# Altium PCB ECGSingleLead.PcbDoc
Units mil, origin at the board's own origin, x right, y up, seen from the top; angles counter-clockwise.
Board outline 4330.71 x 1181.1 mil, 4 copper layers (Top Layer, GND, POWER, Bottom Layer), stack 63.977 mil thick; 36 components, 28 nets, 134 pads, 29 vias.
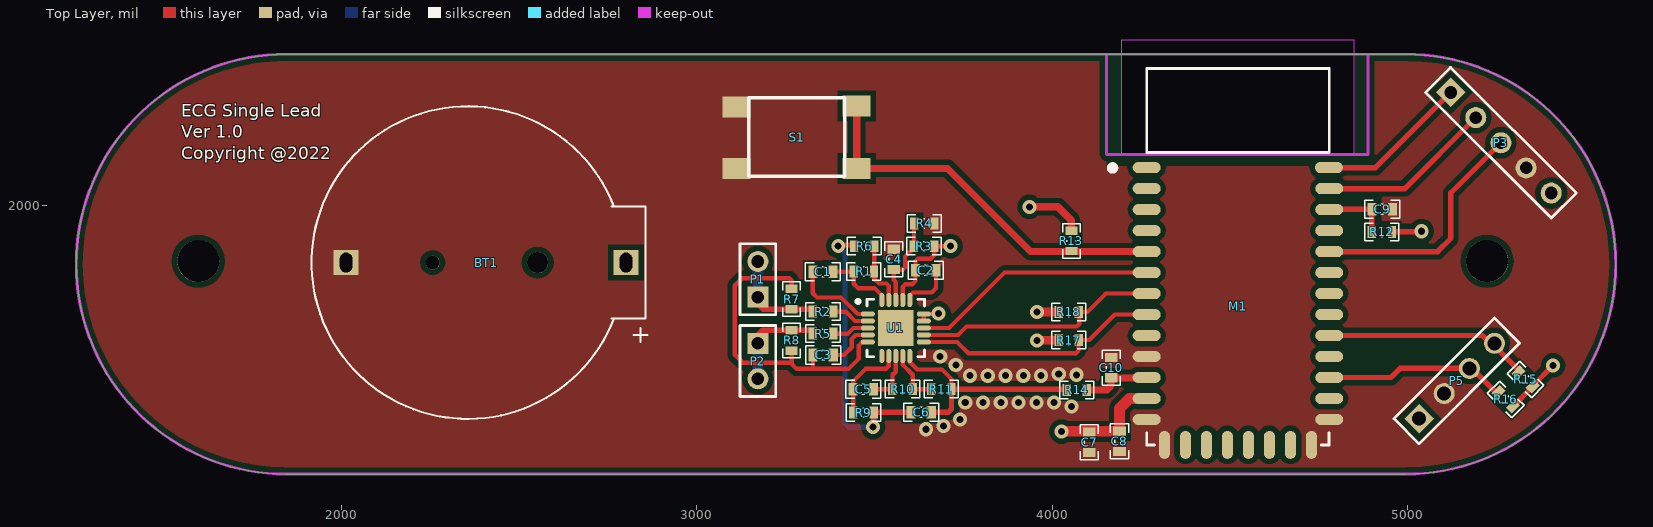
[diagram p0: Top Layer view]
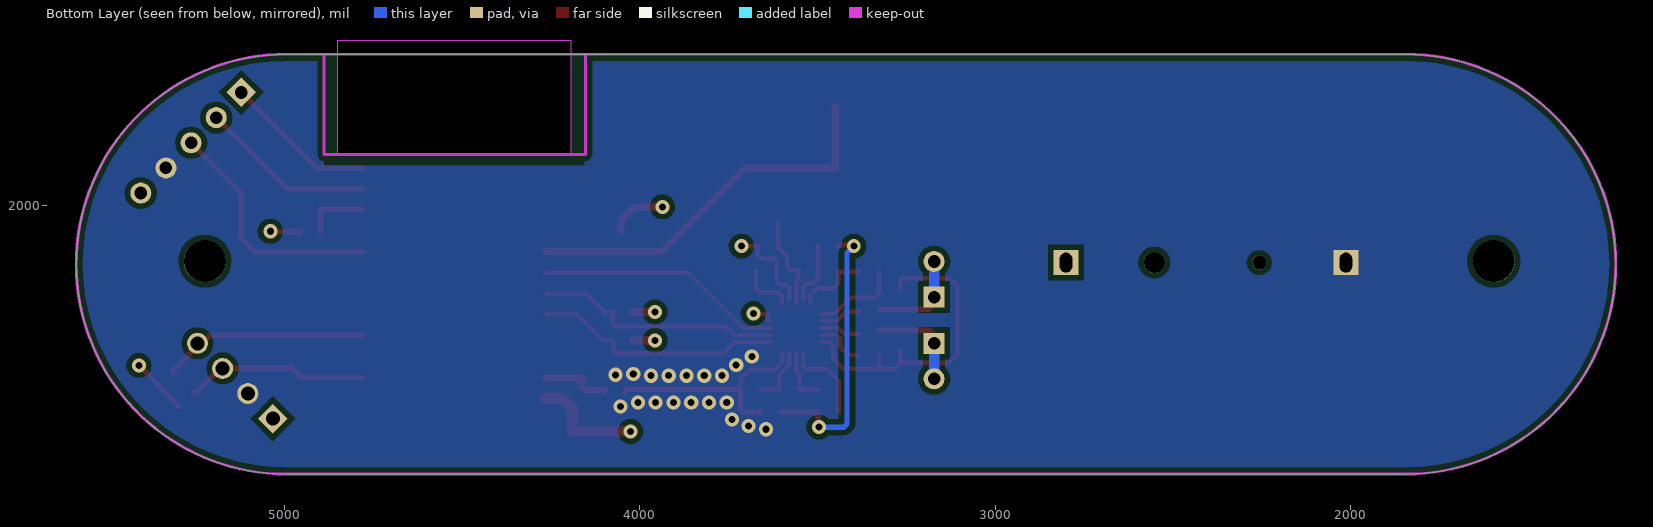
[diagram p1: Bottom Layer view, seen from below]
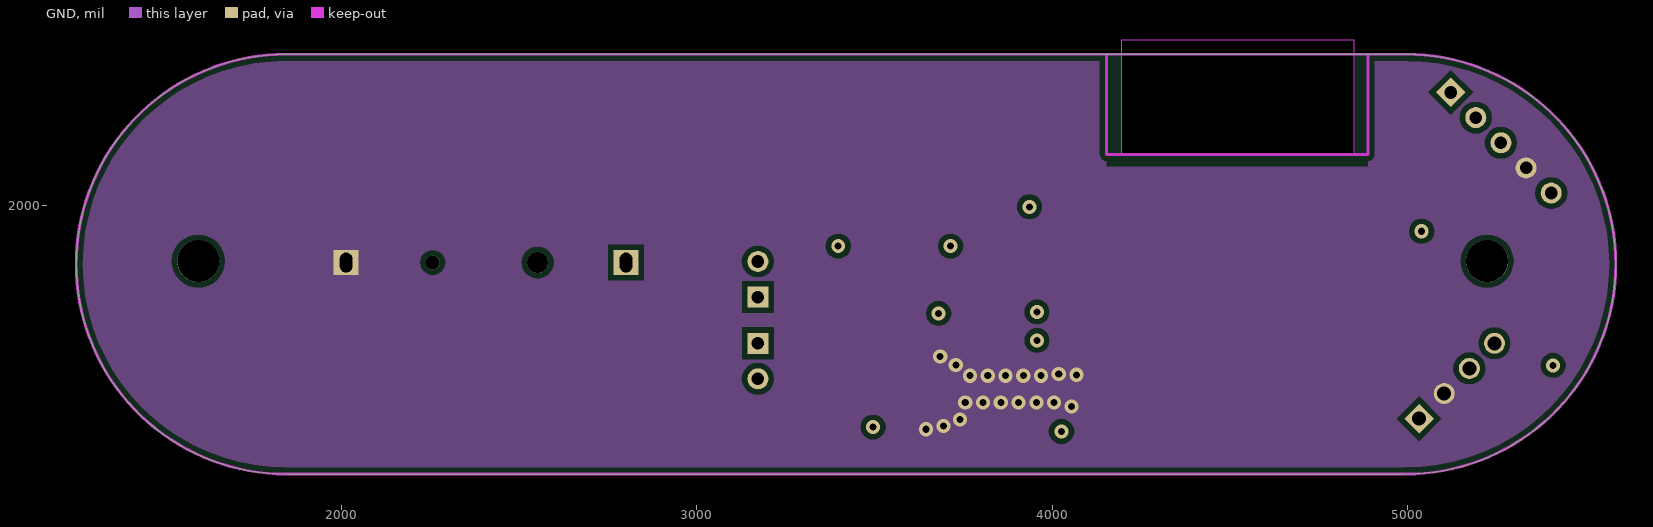
[diagram p2: GND]
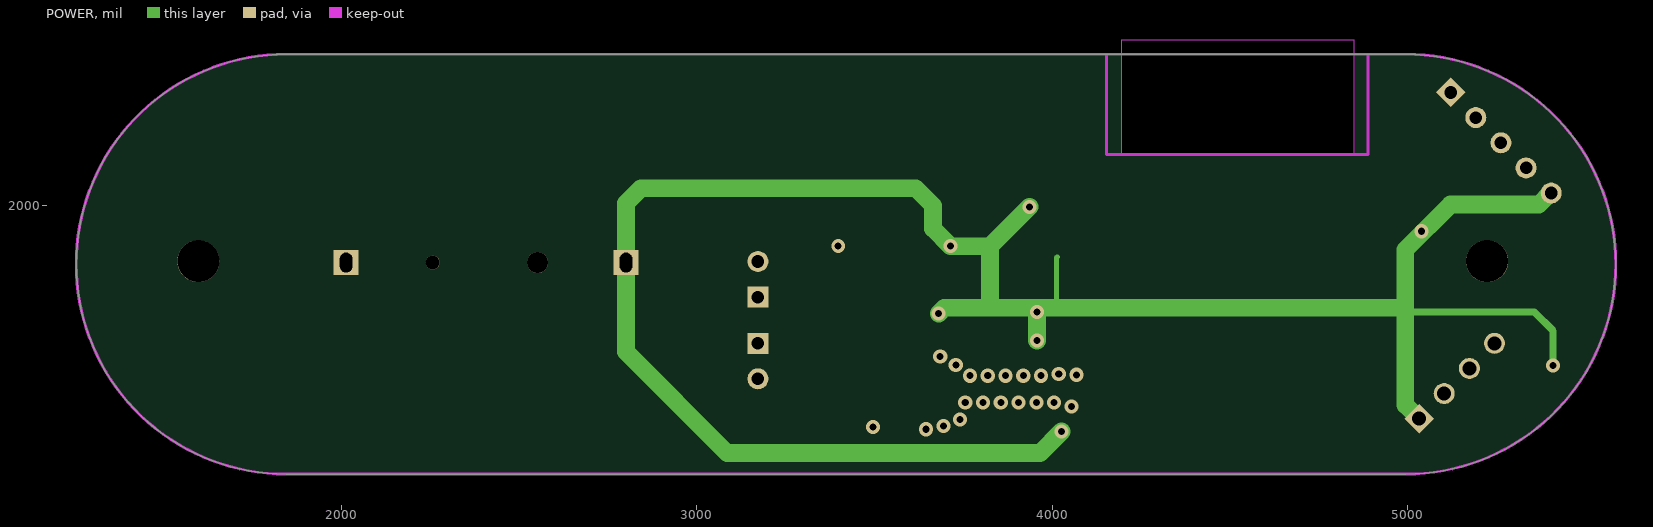
[diagram p3: POWER]
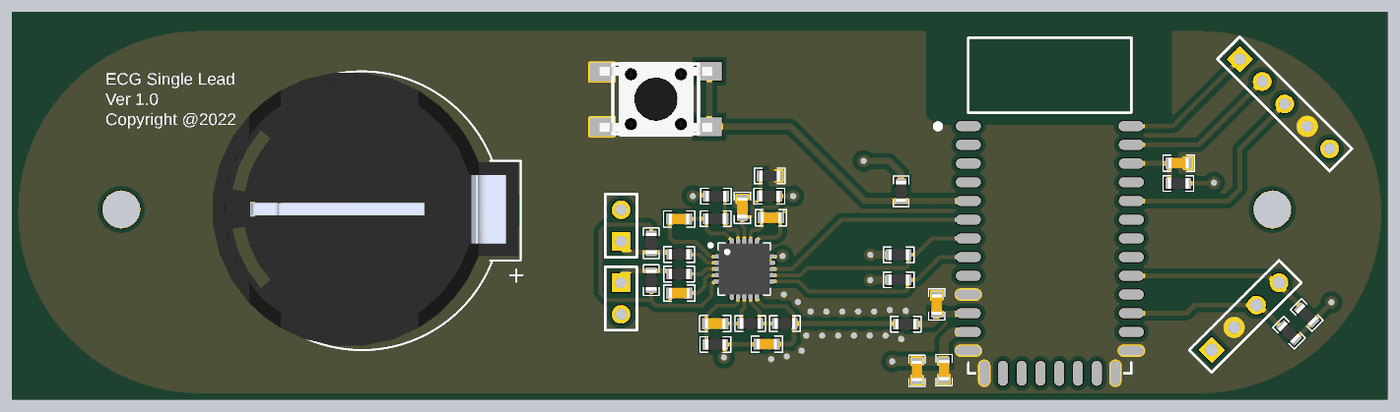
[diagram p4: 3D render of the assembled board from above, using the file's embedded part models]

## Layer stack, top to bottom
Top Solder: solder mask 0.3937, Solder Resist, Dk 3.5
Top Layer: signal copper 1.378
Prepreg 2 - 2116: prepreg 9.7244, PP-016, Dk 4.4
GND: signal copper 1.378
Core 1: core 39.0157, Core-042, Dk 4.6
POWER: signal copper 1.378
Prepreg 3 - 2116: prepreg 9.7244, PP-016, Dk 4.4
Bottom Layer: signal copper 1.378
Bottom Solder: solder mask 0.3937, Solder Resist, Dk 3.5

## Board outline
1845,1244 cw(c1845,1834.55) 1845,2425.1 4994.61,2425.1 cw(c4994.61,1834.55) 4994.61,1244
cut-out: 4194,2465 4194,2143 4850,2143 4850,2465

## Design rules (kind name [scope] priority, off if disabled: settings)
Clearance [All] p1: gap=15 ignorepadtopadclearanceinfootprint=TRUE except(5: Arc-SMDPad Track-SMDPad SMDPad-SMDPad; 6: Arc-Arc Arc-Track Track-Track; 7.87: Arc-THPad Track-THPad; 8: Arc-Text Arc-Hole Track-Text Track-Hole SMDPad-THPad SMDPad-Via SMDPad-Text SMDPad-Hole THPad-Via THPad-Text THPad-Hole Via-Text Via-Hole Fill-Text Fill-Hole Poly-Text Poly-Hole Region-Text Region-Hole Text-Text Text-Hole; 10: Arc-Via Track-Via Via-Via; 19.68: THPad-THPad)
HoleSize [All] p1: absolutevalues=TRUE maxlimit=248.03 minlimit=7.87 maxpercent=80.000 minpercent=20.000
PolygonConnect [All] p1: connectstyle=Direct reliefconductorwidth=10 reliefentries=4 polygonreliefangle="90 Angle" airgapwidth=10
RoutingVias [All] p1: holewidth=20 width=40 viastyle="Through Hole" minholewidth=7.87 minwidth=17.72 maxholewidth=20 maxwidth=40
SolderMaskExpansion [All] p1: expansion=4 istentingtop=FALSE
Width [OnLayer('GND') or OnLayer('POWER')] p1: maxlimit=100 minlimit=3.5 preferedwidth=10 toplayer_maxwidth=80 midlayer1_minwidth=10 midlayer2_minwidth=10 bottomlayer_maxwidth=80 minimp=50.000000 maximp=50.000000 favimp=50.000000
29 further rules are at their usual default settings.

## Components (designator, comment, footprint, x,y, rotation, side; value= is the part's Value field where it differs from the comment)
BT1 "Battery" BTH2032_DIP 1916.3,1837 r180 top
C1 "Cap" CAP0603 3355,1813 r180 top value=3.3uF
C2 "Cap" CAP0603 3644,1817 r180 top value=0.1uF
C3 "Cap" CAP0603 3355.46,1579 r180 top value=1nF
C4 "Cap" CAP0603 3554,1848 r270 top value=0.1uF
C5 "Cap" CAP0603 3468.54,1483 r0 top value=5.6nF
C6 "Cap" CAP0603 3631,1418 r0 top value=5.6nF
C7 "Cap" CAP0603 4104,1333.54 r270 top value=2.2uF
C8 "Cap" CAP0603 4189,1336 r270 top value=0.1uF
C9 "Cap" CAP0603 4928,1989.28 r0 top value=1uF
C10 "Cap" CAP0603 4166,1543.46 r90 top value=0.1uF
M1 "YJ-16048" YJ-16048 4522.31,1716.15 r0 top
P1 "Header 2" HDR1X2 3172,1742 r90 top
P2 "Header 2" HDR1X2 3172,1612 r270 top
P3 "Header 5" HDR1X5 5120.58,2317.42 r315 top
P5 "Header 4" HDR1X4 5031.87,1399.87 r45 top
R1 "Res1" RES0603 3470,1814 r0 top value=10M
R2 "Res1" RES0603 3355,1701 r0 top value=180K
R3 "Res1" RES0603 3639,1885 r180 top value=10M
R4 "Res1" RES0603 3640,1949 r180 top value=10M
R5 "Res1" RES0603 3355,1639 r0 top value=180K
R6 "Res1" RES0603 3471,1885 r180 top value=499K
R7 "Res1" RES0603 3267,1736.46 r90 top value=10M
R8 "Res1" RES0603 3267,1620 r270 top value=10M
R9 "Res1" RES0603 3469,1417 r0 top value=1M
R10 "Res1" RES0603 3579,1483 r180 top value=1M
R11 "Res1" RES0603 3688,1483 r180 top value=1M
R12 "Res1" RES0603 4927.02,1925 r180 top value=47K
R13 "Res1" RES0603 4054,1900 r90 top value=4.7K
R14 "Res1" RES0603 4069,1481 r0 top value=1.5K
R15 "Res1" RES0603 5331.34,1510.11 r135 top value=4.7K
R16 "Res1" RES0603 5275.48,1454.25 r315 top value=4.7K
R17 "Res1" RES0603 4046.46,1621 r0 top value=4.7K
R18 "Res1" RES0603 4046.46,1700 r180 top value=4.7K
S1 "SW-PB" SW-4PIN-SMD 3273,2192 r0 top
U1 "AD8233" CP-20-8 3560,1655 r0 top

## Footprints (in the part's own frame and the unit in brackets; to place one, negate y for a bottom-side part, rotate by r counter-clockwise, add the part's x,y. Pads: shape width x height; smd on the part's side, far side on the other; paste and mask are expansions set on the pad)
BTH2032_DIP [mm]
  round 1.5 hole 1.5 unplated: 0(-16.154,-0.051)
  round 1 hole 1 unplated: 0(-8.661,-0.051)
  rect 1.8x1.8 hole 0.9 slot 1.4 at 90 deg: 1(-22.471,-0.051) 2(-2.471,-0.051)
  silkscreen extent -24.02,-11.22 -0.01,11.12, body extent -23.67,-11.18 0.83,10.82, height 8.6
CAP0603 [mm] "Chip Capacitor, 2-Leads, Body 1/60x0/80mm, IPC Medium Density DESIGNER:ABBAS BASEREH"
  rect 0.65x0.9 smd: 1(-0.725,0) 2(0.725,0)
  silkscreen extent -1.25,-0.65 1.25,0.65, body extent -0.82,-0.43 0.82,0.43, height 0.4
CP-20-8 [mm]
  oval 1x0.35 smd: 1(-2,1) 2(-2,0.5) 3(-2,0) 4(-2,-0.5) 5(-2,-1) 11(2,-1) 12(2,-0.5) 13(2,0) 14(2,0.5) 15(2,1)
  oval 0.35x1 smd: 6(-1,-2) 7(-0.5,-2) 8(0,-2) 9(0.5,-2) 10(1,-2) 16(1,2) 17(0.5,2) 18(0,2) 19(-0.5,2) 20(-1,2)
  rect 2.55x2.55 smd: ""(0,0)
  silkscreen extent -2.82,-2.05 2.05,2.05, body extent -2.05,-2.05 2.05,2.05, height 0.8
HDR1X2 [mm] "Connector; Header; 2 Position"
  rect 1.5x1.5 hole 0.9: 1(0,0)
  round 1.5 hole 0.9: 2(2.54,0)
  silkscreen extent -1.27,-1.27 3.81,1.27
HDR1X4 [mm] "Connector; Header; 4 Position"
  rect 1.5x1.5 hole 1: 1(0,0)
  round 1.5 hole 1: 2(2.54,0) 3(5.08,0) 4(7.62,0)
  silkscreen extent -1.27,-1.27 8.89,1.27
HDR1X5 [mm] "Connector; Header; 5 Position"
  rect 1.5x1.5 hole 0.9: 1(0,0)
  round 1.5 hole 0.9: 2(2.54,0) 3(5.08,0) 4(7.62,0) 5(10.16,0)
  silkscreen extent -1.27,-1.27 11.43,1.27
RES0603 [mm] "Chip Resistor, 2-Leads, Body 1/60x0/80mm, IPC Medium Density DESIGNER:ABBAS BASEREH"
  rect 0.6x0.85 smd: 1(-0.725,0) 2(0.725,0)
  silkscreen extent -1.22,-0.63 1.22,0.63, body extent -0.82,-0.43 0.82,0.43, height 0.4
SW-4PIN-SMD [mil]
  rect 78.74x59.06 smd: 1(177,-88) 1(177,87) 2(-161,-88) 2(-161,85)
  silkscreen extent -127,-110 143,110, body extent -168,-119 186,117, height 174
YJ-16048 [mm]
  oval 2x0.8 smd: 1(-6.52,9.905) 2(-6.52,8.405) 3(-6.52,6.905) 4(-6.52,5.405) 5(-6.52,3.905) 6(-6.52,2.405) 7(-6.52,0.905) 8(-6.52,-0.595) 9(-6.52,-2.095) 10(-6.52,-3.595) 11(-6.52,-5.095) 12(-6.52,-6.595) 13(-6.52,-8.095) 22(6.52,-8.095) 23(6.52,-6.595) 24(6.52,-5.095) 25(6.52,-3.595) 26(6.52,-2.095) 27(6.52,-0.595) 28(6.52,0.905) 29(6.52,2.405) 30(6.52,3.905) 31(6.52,5.405) 32(6.52,6.905) 33(6.52,8.405) 34(6.495,9.905)
  oval 0.8x2 smd: 14(-5.25,-9.905) 15(-3.75,-9.905) 16(-2.25,-9.905) 17(-0.75,-9.905) 18(0.75,-9.905) 19(2.25,-9.905) 20(3.75,-9.905) 21(5.25,-9.905)
  silkscreen extent -9.16,-9.91 6.52,17, body extent -6.56,-9.91 6.56,17.04, height 0.8

## Part data
BT1: "Multicell Battery", LatestRevisionDate=17-Jul-2002, LatestRevisionNote="Re-released for DXP Platform.", PackageDescription="Battery; 2 Leads", PackageReference=BAT-2, Published=24-Mar-1999, Publisher="Altium Limited"
C1 C2 C3 C4 C5 C6 C7 C8 C9 C10: "Capacitor", LatestRevisionDate=17-Jul-2002, LatestRevisionNote="Re-released for DXP Platform.", PackageDescription="Radial Cap, Thru-Hole; 2 Leads; 0.3 in Pin Spacing", PackageReference=RAD-0.3, Published=8-Jun-2000, Publisher="Altium Limited"
M1: library part nrf52832-M, "nrf52832 Module-Bluetooth 5.0 Low Energy Module", LatestRevisionDate=17-Jul-2002, LatestRevisionNote="Re-released for DXP Platform.", Publisher="Altium Limited"
P1 P2: "Header, 2-Pin", LatestRevisionDate=17-Jul-2002, LatestRevisionNote="Re-released for DXP Platform.", Publisher="Altium Limited"
P3: "Header, 5-Pin", LatestRevisionDate=17-Jul-2002, LatestRevisionNote="Re-released for DXP Platform.", Publisher="Altium Limited"
P5: "Header, 4-Pin", LatestRevisionDate=17-Jul-2002, LatestRevisionNote="Re-released for DXP Platform.", Publisher="Altium Limited"
R1 R2 R3 R4 R5 R6 R7 R8 R9 R10 R11 R12 R13 R14 R15 R16 R17 R18: "Resistor", LatestRevisionDate=17-Jul-2002, LatestRevisionNote="Re-released for DXP Platform.", PackageDescription="Axial Device, Thru-Hole; 2 Leads; 0.3 in Pin Spacing", PackageReference=AXIAL-0.3, Published=8-Jun-2000, Publisher="Altium Limited"
S1: "Switch", LatestRevisionDate=17-Jul-2002, LatestRevisionNote="Re-released for DXP Platform.", PackageDescription="Switch; 2 Leads", PackageReference=SPST-2, Published=24-Mar-1999, Publisher="Altium Limited"
U1: library part AD8232, "Single-Lead, Heart Rate Monitor Front End", LatestRevisionDate=17-Jul-2002, LatestRevisionNote="Re-released for DXP Platform.", Publisher="Altium Limited"

## Free pads (board coordinates)
  round 118.11 hole 118.11: ""(1598,1843) ""(5223,1843)

## Via types
v1: diameter 40, hole 20, Top Layer to Bottom Layer, tented both sides, 21 vias
v2: diameter 39.37, hole 19.68, Top Layer to Bottom Layer, tented both sides, 8 vias

## Nets (pads, with @x,y where several pads share a name; then routed paths per layer and width w, separated by ;. In a path a pad name is that pad's centre, name@x,y a point inside that pad or via, vN(x,y) a via of type N, cw(c..) or ccw(c..) an arc to the next point about the centre after c; other vN are vias at no path point)
+Vs: BT1.1 C2.2 C7.1 C8.1 M1.12 P3.5 P5.1 R3.1 R12.1 R13.2 R15.1 R16.2 R17.1 R18.2 U1.14 U1.15 U1.17 | length 7555.9
  Top Layer w12: U1.17 3579.69,1770.97 3586.71,1778 3606,1778 3615,1787 3615,1842.97 3622.03,1850 3658,1850 3668,1860 3668,1884.54 R3.1 v2(3714,1885) ; U1.14 U1.15 3678.82,1694.37 v2(3680.48,1696.03)
  Top Layer w15: R13.2@4053.54,1929 R13.2 ; R12.1 4956.56,1926 5034,1926 5037,1929 v1(5039,1927) ; R16.2 R15.1 5351.53,1492.53 v2(5409,1550) ; P3.5@5395.58,2034.58 P3.5
  Top Layer w20: v2(3936,1996) 4015.46,1996 4053.54,1957.92 R13.2@4053.54,1929
  Top Layer w25: v2(3957,1620) 3957.5,1620.5 4017.41,1620.5 R17.1 ; v2(3957,1700) R18.2@4017.46,1700 ; v1(4026,1363.54) 4027.16,1362.38 4103.7,1362.38 C7.1
  Top Layer w30: v1(4026,1363.54) 4026.5,1364.04 4188.5,1364.04 C8.1 4189,1428.5 4217,1456.5 M1.12
  POWER w15: 4012,1712 4012,1852.69 4014,1854.69
  POWER w20: 4993,1712 5005,1700 5356,1700 5409,1647 v2(5409,1550)
  POWER w50: BT1.1@2800.7,1861 2800.7,2005.7 2843,2048 3615.71,2048 3664.86,1998.86 3664.86,1934.14 v2(3714,1885) 3825,1885 ; BT1.1 2801,1588 3086,1303 3965.46,1303 v1(4026,1363.54) ; v2(3680.48,1696.03) 3696.45,1712 3825,1712 ; v2(3936,1996) 3825,1885 ; v2(3957,1620) v2(3957,1700) ; P5.1 4993,1438.74 4993,1712 ; P3.5 5400.97,2034.58 5368.39,2002 5120,2002 4993,1875 4993,1712 ; 3825,1712 4012,1712 4993,1712 ; 3825,1712 3825,1885
ECG_OUT: C10.1 M1.11 R14.2 | length 205.1
  Top Layer w20: R14.2 4139.22,1481 4153.28,1481 4165,1492.72 C10.1@4165,1513.78 ; C10.1@4158.28,1512.12 4161.08,1514.91 C10.1 4165,1513.91 C10.1@4165,1513.78 ; M1.11 4263.83,1513.78 C10.1@4165,1513.78
GND: BT1.2 C2.1 C4.1 C7.2 C8.2 C9.2 C10.2 M1.10 M1.13 M1.14 M1.21 M1.22 P3.4 P5.2 R4.1 S1.2 U1.16 | length 153.9
  Top Layer w12: U1.16@3599.37,1724.88 3599.71,1725.22 3599.71,1746.71 3608,1755 3661,1755 3673,1767 3673,1816.54 C2.1
  other v1: 3644.82,1370.28 3694.01,1379.25 3740.64,1397.28 4054.08,1434.25 3755.27,1445.09 3805.27,1445.09 3855.27,1445.09 3905.27,1445.09 3955.27,1445.09 4005.27,1445.09 3768.57,1520.91 3818.57,1520.91 3868.57,1520.91 3918.57,1520.91 3968.57,1520.91 4068.25,1523.28 4018.32,1525.93 3728.79,1551.19 3684.69,1574.75
KEY: M1.5 R13.1 S1.1 | length 1087.6
  Top Layer w20: S1.1@3450,2279 3450,2104 3705,2104 3847,1962 3939.11,1869.89 4057,1869.89 M1.5
LEAD_N: P2.1 P2.2 R5.1 R8.1 | length 284
  Top Layer w15: P2.1 3176,1616 3176,1640.21 3184.79,1649 R5.1@3326.46,1649
  Bottom Layer w30: P2.2 P2.1
LEAD_P: P1.1 P1.2 R2.1 R7.1 | length 279.8
  Top Layer w15: P1.1 3176,1738 3176,1718.79 3186.79,1708 R2.1@3326.46,1708
  Bottom Layer w30: P1.1 P1.2
LEADOFF_N: M1.8 R17.2 U1.11 | length 710.8
  Top Layer w12: U1.11@3629.88,1615.63 3732.37,1615.63 3764,1584 4066.97,1584 4074,1591.03 4074,1620 R17.2 4104,1621 4175.72,1692.72 M1.8
LEADOFF_P: M1.7 R18.1 U1.12 | length 705.9
  Top Layer w12: U1.12@3629.88,1635.32 3735.32,1635.32 3759,1659 4068.97,1659 4076,1666.03 4076,1698.54 4074.54,1700 4099,1700 4150.78,1751.78 M1.7
NetC1_1: C1.1 R1.1 U1.20 | length 207.3
  Top Layer w12: C1.1 3384.04,1813.5 3440.96,1813.5 R1.1 3441.46,1779.54 3454,1767 3500.01,1767 3520.63,1746.38 U1.20 ; U1.20@3520.29,1733.74 3520.29,1725.22 U1.20@3520.63,1724.88
NetC1_2: C1.2 U1.1 | length 248.2
  Top Layer w12: C1.2 3326.46,1752.54 3338,1741 3406,1741 3452.63,1694.37 U1.1@3490.12,1694.37
NetC3_1: C3.1 U1.4 | length 142.9
  Top Layer w12: C3.1 3414,1579 3436,1601 3436,1624 3447.32,1635.32 U1.4@3490.12,1635.32
NetC3_2: C3.2 R7.2 R8.2 U1.5 | length 918.2
  Top Layer w12: R8.2 3267,1554 ; R7.2 3267,1787.97 3259.97,1795 3128,1795 3107,1774 3107,1580 3130,1557 3264,1557 3267,1554 ; C3.2 3326.91,1541.09 3328,1540 ; U1.5@3490.12,1615.63 3465.63,1615.63 3456,1606 3456,1569 3427,1540 3328,1540 ; 3267,1554 3281,1540 3328,1540
NetC4_2: C4.2 R3.2 R4.2 U1.18 | length 264.7
  Top Layer w12: C4.2 3554,1790 3560,1784 U1.18 U1.18@3560,1724.88 ; C4.2@3555,1819.46 3555.46,1819 3578.97,1819 3586,1826.03 3586,1855.62 3610.46,1880.08 R3.2 3610.96,1885.5 3610.96,1948.5 R4.2
NetC5_1: C5.1 R9.1 U1.7 | length 243.3
  Top Layer w12: R9.1 3440.46,1505.97 3474.49,1540 3532,1540 3539.97,1547.97 3539.97,1575.92 U1.7 ; U1.7@3539.97,1576.26 3539.97,1584.78 U1.7@3540.32,1585.12
NetC5_2: C5.2 R10.2 U1.8 | length 160.9
  Top Layer w12: C5.2 R10.2 3550.46,1525 3553,1525 3560,1532 U1.8 U1.8@3560,1585.12
NetC6_1: C6.1 R6.2 R9.2 | length 784.9
  Top Layer w15: v2(3398,1885) 3401.48,1888.48 3438.98,1888.48 R6.2 ; v2(3496,1376) 3497.54,1377.54 R9.2 3498.04,1417.5 3601.96,1417.5 C6.1
  Bottom Layer w15: v2(3398,1885) 3417,1866 3417,1385 3426,1376 v2(3496,1376)
NetC6_2: C6.2 R11.1 R14.1 U1.10 | length 647.8
  Top Layer w12: U1.10@3599.37,1585.12 3599.37,1558.63 3620,1538 3690,1538 3716.54,1511.46 R11.1
  Top Layer w15: C6.2 3659.54,1422.54 3660,1423 3660,1422.84 3664.84,1418 3707.76,1418 3716.54,1426.79 R11.1 4035.38,1483 4041.46,1476.92 R14.1@4041.46,1472
NetR1_2: R1.2 R6.1 U1.19 | length 180.8
  Top Layer w12: R6.1 3499.04,1884.5 3499.04,1793.42 3512.47,1780 3533.29,1780 3540.32,1772.97 U1.19
NetR2_2: R2.2 U1.2 | length 117.5
  Top Layer w12: R2.2 3419,1701 3445.32,1674.68 U1.2@3490.12,1674.68
NetR5_2: R5.2 U1.3 | length 113.2
  Top Layer w12: R5.2 3425,1639 3441,1655 U1.3@3490.12,1655
NetR10_1: R10.1 R11.2 U1.9 | length 165.6
  Top Layer w12: U1.9@3579.68,1585.12 3579.68,1551.32 3607.54,1523.46 R10.1 R11.2
rst_nrf: C9.1 M1.32 R12.2 | length 184
  Top Layer w15: M1.32 4779.64,1988.64 4898.81,1988.64 4898.96,1988.49 4898.96,1925.49 R12.2
RX_nrf: M1.26 P5.4 R15.2 | length 579.7
  Top Layer w15: M1.26 5210.41,1633.67 5239.35,1604.73 5244,1604.73 5311.75,1536.98 5311.75,1530.88 R15.2
S\H\D\N\_\A\M\P\: M1.6 U1.13 | length 700.3
  Top Layer w12: U1.13@3629.88,1655 3710,1655 3865.83,1810.83 M1.6
SWCLK: M1.33 P3.2 | length 495
  Top Layer w15: M1.33 4991.63,2047.06 P3.2
SWDIO: M1.34 P3.1 | length 430.1
  Top Layer w15: M1.34 4909.27,2106.11 P3.1
SWO: M1.30 P3.3 | length 684.8
  Top Layer w15: M1.30 5083.89,1869.89 5121,1907 5121,2035 P3.3
TX_nrf: M1.24 P5.3 R16.1 | length 515.3
  Top Layer w15: M1.24 4952.56,1515.56 4978.29,1541.29 P5.3 5180.86,1541.29 5248.46,1473.69 5254.56,1473.69 R16.1
pads on no net: BT1.0 M1.1 M1.2 M1.3 M1.4 M1.9 M1.15 M1.16 M1.17 M1.18 M1.19 M1.20 M1.23 M1.25 M1.27 M1.28 M1.29 M1.31 U1. U1.6

## Polygon pours and split planes (outlines as drawn)
no net on Keep-Out Layer "NONET_L-01_P-001" (none): 1845,1244 cw(c1845,1834.55) 1845,2425.1 4994.61,2425.1 cw(c4994.61,1834.55) 4994.61,1244
GND on Bottom Layer "GND_L04_P006" (solid, remove dead copper, pour order 6): 1845,1244 cw(c1845,1834.55) 1845,2425.1 4994.61,2425.1 cw(c4994.61,1834.55) 4994.61,1244
GND on Top Layer "GND_L01_P004" (solid, remove dead copper, pour order 4): 1845,1244 cw(c1845,1834.55) 1845,2425.1 4994.61,2425.1 cw(c4994.61,1834.55) 4994.61,1244
GND on GND "GND_L02_P007" (solid, remove dead copper, pour order 7): 1845,1244 cw(c1845,1834.55) 1845,2425.1 4994.61,2425.1 cw(c4994.61,1834.55) 4994.61,1244

## Keep-outs
Keep-Out Layer:
  lines w7.99: 1845,1244 cw(c1845,1834.55) 1845,2425.1 ; 4994.61,1244 ccw(c4994.61,1834.55) 4994.61,2425.1
  lines w8: 1845,1244 4994.61,1244 ; 1845,2425.1 4994.61,2425.1 ; 4152.21,2423.05 4152.21,2143.79 4152.71,2143.29 4888.29,2143.29 ; 4888,2143 4888,2422.47

## Other copper
Top Layer:
  pour cut-out: 4152.21,2423.05 4152.21,2110 4888.58,2110 4888.58,2423.05
GND:
  pour cut-out: 4151.57,2425.1 4151.57,2109 4888.26,2109 4888.26,2423.51
Bottom Layer:
  pour cut-out: 4154,2425.1 4154,2400 4154,2111 4888.58,2111 4888.58,2425.1

## Silkscreen, mask and mechanical layers (free items; w line width, h text height)
Top Overlay:
  text "ECG Single Lead / Ver 1.0 / Copyright @2022" at 1550,2117 h60

## Dimensions
4994.61,1244 to 4994.61,2425.1 on Mechanical 1
5585.16,1834.55 to 1254.45,1834.55 on Mechanical 1